# EAGLE board module_SX1278_type1 (EAGLE 9.0.1)
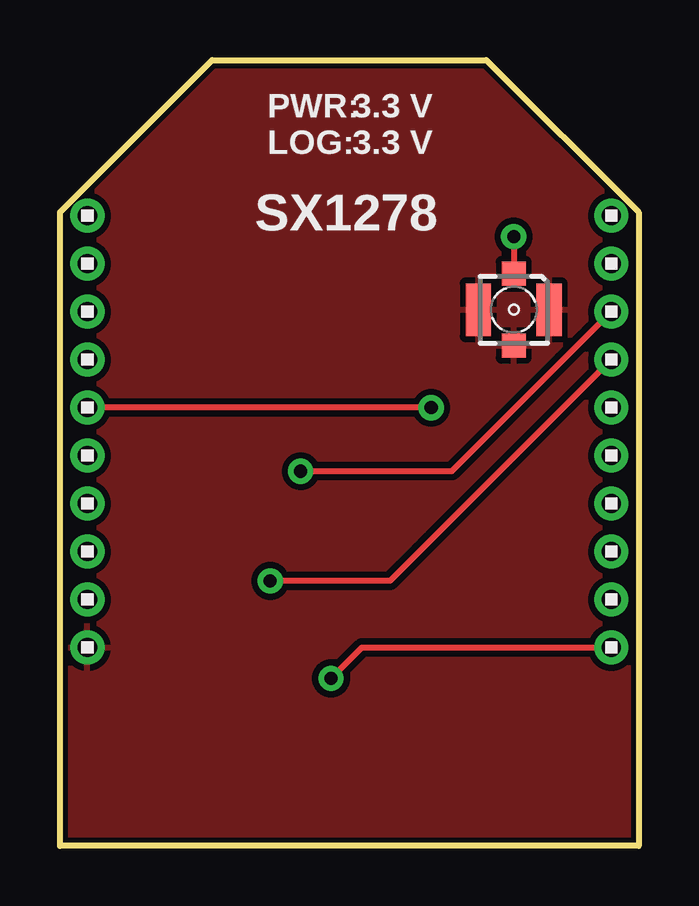
[diagram p0: board, top side]
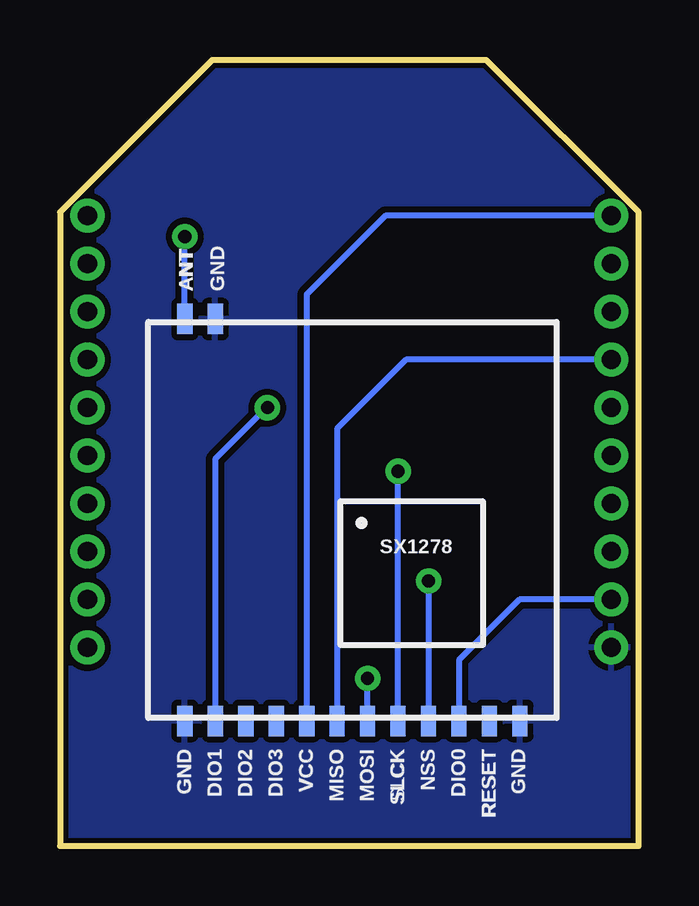
[diagram p1: board, bottom side, seen from below]

Size 24.13 x 32.77 mm. Coordinates in mm from the lower left corner, seen from the top.
Outline: 0,0 0,26.42 6.35,32.77 17.78,32.77 24.13,26.42 24.13,0 0,0
Copper layers (1*16): Top 0.035mm / dielectric 1.5mm / Bottom 0.035mm
Design rules "SparkFun-2-layer-STANDARD": minimum track width 10mil, minimum drill 20mil, track to track 10mil, track to pad 8mil, pad to pad 8mil, via to via 10mil, smd to smd 8mil, copper to edge 8mil, drill to drill 8mil, minimum pad ring 10mil, minimum via ring 10mil, stop-mask expansion 4mil, vias tented up to drill 25mil, thermal gap 10mil

## Footprints (pad centres in the part's own frame; a part is rotated, then mirrored left to right if it is on the bottom)
SMD0,65-1,27 = smd 0.635 x 1.27: 1 0,0
1X10 = drill 0.8 pad 1.422: 1 -9,0; 2 -7,0; 3 -5,0; 4 -3,0; 5 -1,0; 6 1,0; 7 3,0; 8 5,0; 9 7,0; 10 9,0
734120110 = smd 1 x 1: 1 0,-1.5; S@1 0,1.5 | smd 1.05 x 2.2: S@2 -1.475,0; S@3 1.475,0

## Placement (x,y rotation side)
ANT  [SMD0,65-1,27]  18.92,21.97 180 bottom
DIO0  [SMD0,65-1,27]  7.49,5.21 180 bottom
DIO1  [SMD0,65-1,27]  17.65,5.21 180 bottom
DIO2  [SMD0,65-1,27]  16.38,5.21 180 bottom
DIO3  [SMD0,65-1,27]  15.11,5.21 180 bottom
GND  [SMD0,65-1,27]  18.92,5.21 180 bottom
GND2  [SMD0,65-1,27]  4.95,5.21 180 bottom
GND_ANT  [SMD0,65-1,27]  17.65,21.97 180 bottom
LEFT1  1X10  [1X10]  1.14,17.27 270 top
MISO  [SMD0,65-1,27]  12.57,5.21 180 bottom
MOSI  [SMD0,65-1,27]  11.3,5.21 180 bottom
NSS  [SMD0,65-1,27]  8.76,5.21 180 bottom
RESET  [SMD0,65-1,27]  6.22,5.21 180 bottom
RIGHT1  1X10  [1X10]  22.99,17.27 270 top
SLCK  [SMD0,65-1,27]  10.03,5.21 180 bottom
VCC  [SMD0,65-1,27]  13.84,5.21 180 bottom
X1  734120110  [734120110]  18.92,22.35 180 top

## Library data of the parts
ANT DIO0 DIO1-DIO3 GND GND2 GND_ANT MISO MOSI NSS RESET SLCK VCC = wirepad
LEFT1 RIGHT1 = headers(2mm)
X1 = con-coax

## Nets
ANT: ANT.1 X1.1
GND: GND2.1 GND.1 GND_ANT.1 LEFT1.10 X1.S@1 X1.S@2 X1.S@3
INT0: DIO0.1 LEFT1.9
INT1: DIO1.1 LEFT1.5
SPI_CS: NSS.1 RIGHT1.4
SPI_MISO: LEFT1.4 MISO.1
SPI_MOSI: MOSI.1 RIGHT1.10
SPI_SCK: RIGHT1.3 SLCK.1
VCC: LEFT1.1 VCC.1

## Tracks (layer width: path | path; a pad name or v marks a point on that pad's centre or on a via)
ANT  (via drill 0.55)
  Top 0.254: v18.92,25.4 X1.1
  Bottom 0.254: ANT.1 v18.92,25.4
GND
  pour Bottom: -0.51,-0.51 -0.51,26.67 6.1,33.27 18.03,33.27 24.64,26.67 24.64,-0.51
  pour Top: -0.25,-0.25 -0.25,26.54 6.22,33.02 17.91,33.02 24.38,26.54 24.38,-0.25
INT0
  Bottom 0.254: LEFT1.9 4.97,10.27 7.49,7.75 DIO0.1
INT1  (via drill 0.55)
  Top 0.254: v15.48,18.27 LEFT1.5
  Bottom 0.254: DIO1.1 17.65,16.13 15.51,18.27 v15.48,18.27
SPI_CS  (via drill 0.55)
  Top 0.254: RIGHT1.4 13.76,11.05 v8.76,11.05
  Top 0.406: RIGHT1.4 22.83,20.27 22.78,20.32
  Bottom 0.254: v8.76,11.05 NSS.1
SPI_MISO
  Bottom 0.254: LEFT1.4 9.7,20.27 12.57,17.4 MISO.1
SPI_MOSI  (via drill 0.55)
  Top 0.254: v11.3,6.99 12.59,8.27 RIGHT1.10
  Bottom 0.254: MOSI.1 v11.3,6.99
SPI_SCK  (via drill 0.55)
  Top 0.254: RIGHT1.3 16.34,15.62 v10.03,15.62
  Bottom 0.254: SLCK.1 v10.03,15.62
VCC
  Bottom 0.254: LEFT1.1 10.56,26.27 13.84,22.99 VCC.1

## Text on the board
_tNames: PWR: / LOG: | 3.3 V / 3.3 V | SX1278
_bNames: GND | ANT | SX1278 | GND | RESET | DIO0 | NSS | SLCK | MOSI | MISO | VCC | DIO3 | DIO2 | DIO1 | GND